# Altium PCB Test_Board_PCB.PcbDoc
Units mil, origin at the board's own origin, x right, y up, seen from the top; angles counter-clockwise.
Board outline 6000 x 4000 mil, 2 copper layers (Top Layer, Bottom Layer); 11 components, 20 nets, 45 pads, 0 vias.
Unrouted connection lines stored in the file: 12.
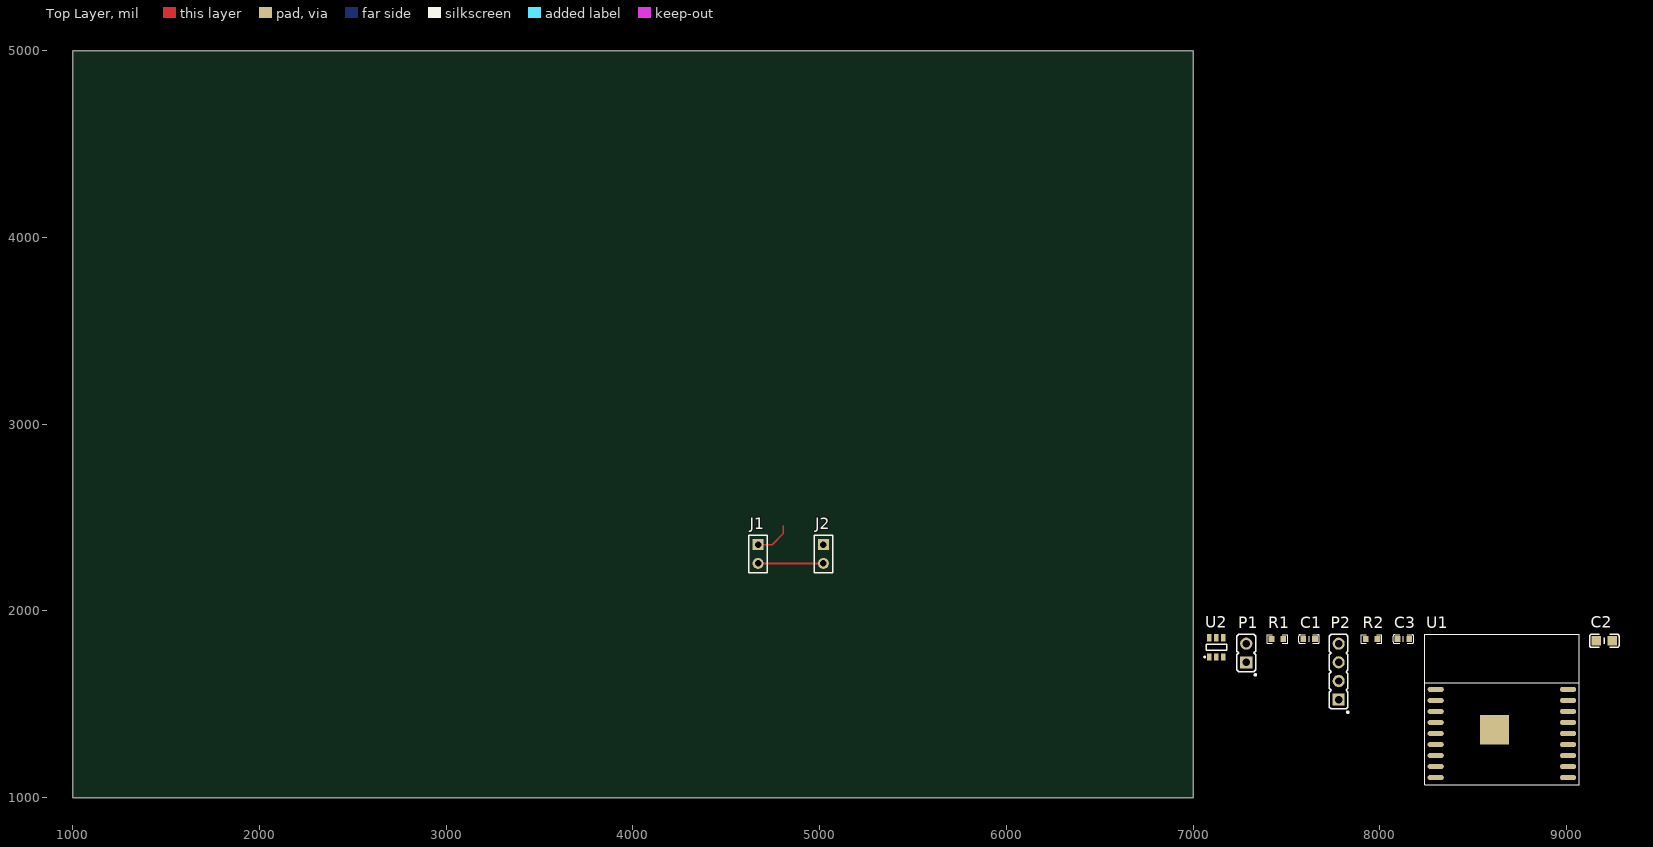
[diagram p0: Top Layer view]
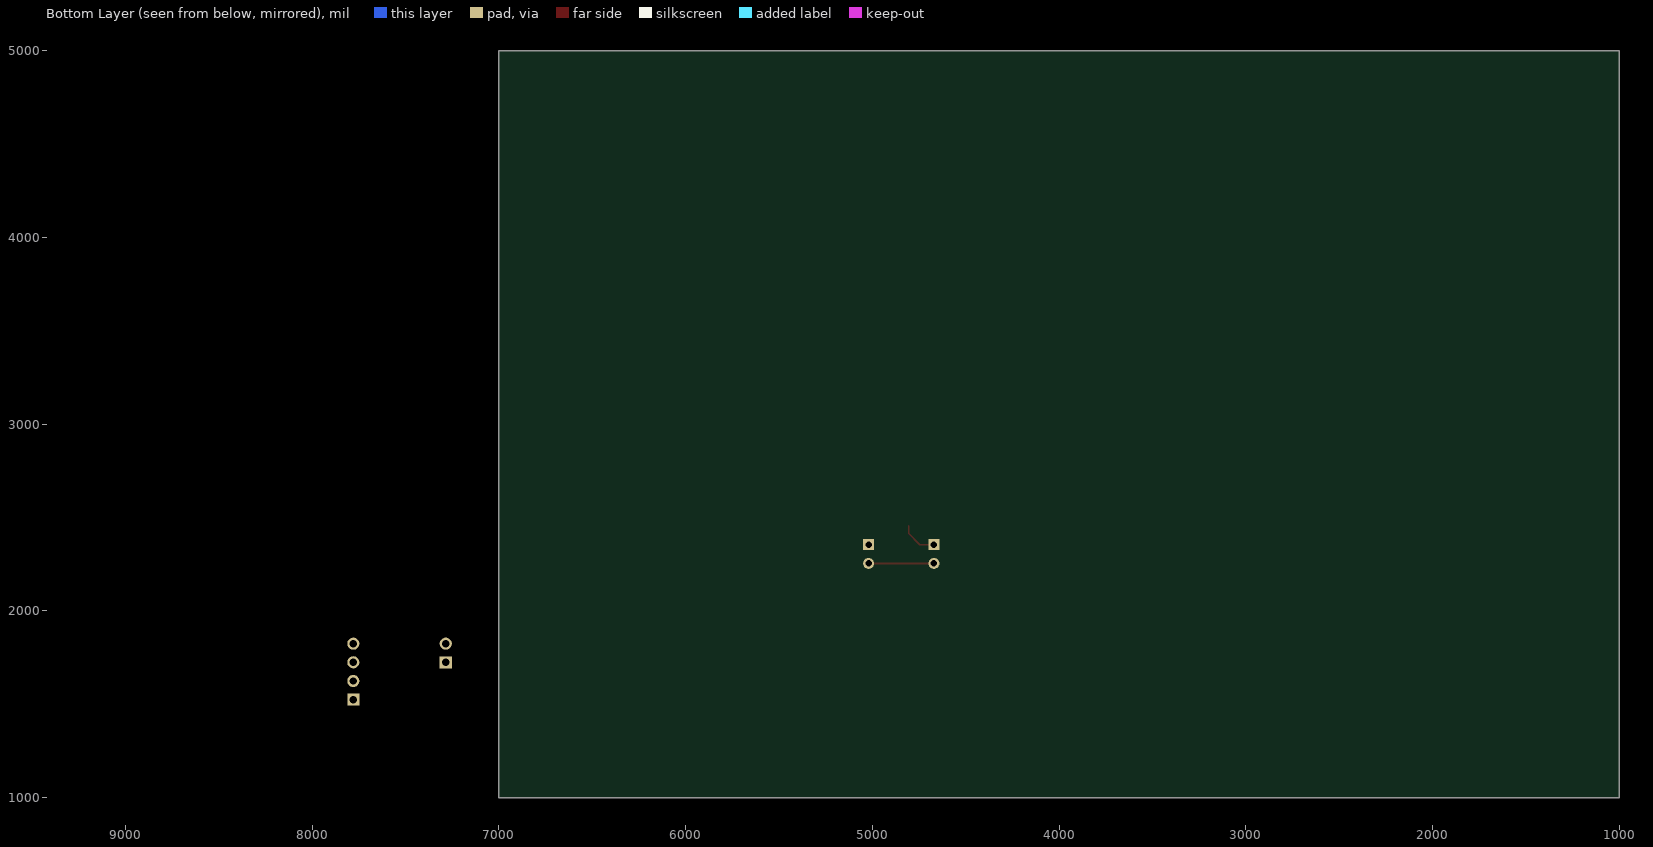
[diagram p1: Bottom Layer view, seen from below]

## Layer stack, top to bottom
Top Solder: solder mask 0.4, Solder Resist, Dk 3.5
Top Layer: signal copper 1.4
Dielectric 1: dielectric 12.6, FR-4, Dk 4.8
Bottom Layer: signal copper 1.4
Bottom Solder: solder mask 0.4, Solder Resist, Dk 3.5

## Board outline
1000,1000 7000,1000 7000,5000 1000,5000

## Design rules (kind name [scope] priority, off if disabled: settings)
Clearance [All] p1: gap=10 ignorepadtopadclearanceinfootprint=FALSE except(0: Arc-Hole Track-Hole SMDPad-Hole THPad-Hole Via-Hole Fill-Hole Poly-Hole Region-Hole Text-Hole)
PolygonConnect [All] p1: connectstyle=Relief reliefconductorwidth=10 reliefentries=4 polygonreliefangle="90 Angle" airgapwidth=10
RoutingVias [All] p1: holewidth=28 width=50 viastyle="Through Hole" minholewidth=28 minwidth=50 maxholewidth=28 maxwidth=50
SolderMaskExpansion [All] p1: expansion=4
Width [All] p1: maxlimit=10 minlimit=10 preferedwidth=10
Width 3V3 [InNetClass('All Nets')] p2: maxlimit=5 minlimit=5 preferedwidth=5
30 further rules are at their usual default settings.

## Classes and differential pairs
net class 5V: 5V GND
net class 3V3: 3V3 GND

## Components (designator, comment, footprint, x,y, rotation, side; value= is the part's Value field where it differs from the comment)
C1 "Cap" C-0603 7590,1850 r0 top value=0.1uF
C2 "Cap" C-0805 9160,1840 r0 top value=10uF
C3 "Cap" C-0603 8095,1850 r0 top value=0.1uF
J1 "Header 2" HDR1X2 4670,2355 r270 top
J2 "Header 2" HDR1X2 5020,2355 r270 top
P1 "Header 2" P1-2,header 7285,1725 r90 top
P2 "Header 4" P1-4,header 7780,1525 r90 top
R1 "Res2" R-0603 7420,1850 r0 top value=10K
R2 "Res2" R-0603 7925,1850 r0 top value=10K
U1 "ESP-WROOM-02" ESP-WROOM-02 8300,1580 r0 top
U2 "RH6016C" SOT-23-6 7125,1805 r0 top

## Footprints (in the part's own frame and the unit in brackets; to place one, negate y for a bottom-side part, rotate by r counter-clockwise, add the part's x,y. Pads: shape width x height; smd on the part's side, far side on the other; paste and mask are expansions set on the pad)
C-0603 [mm]
  rect 0.8x0.8 smd: 1(0,0) 2(1.6,0)
  silkscreen extent -0.6,-0.6 2.2,0.6, body extent 0,-0.4 1.6,0.4, height 0.8
C-0805 [mm]
  rect 1.3x1.3 smd: 1(0,0) 2(2.2,0)
  silkscreen extent -0.9,-0.9 3.1,0.9, body extent 0.1,-0.62 2.1,0.63, height 0.85
ESP-WROOM-02 [mm]
  oval 2.2x0.7 smd: 1(0,0) 2(0,-1.5) 3(0,-3) 4(0,-4.5) 5(0,-6) 6(0,-7.5) 7(0,-9) 8(0,-10.5) 9(0,-12) 10(18,-12) 11(18,-10.5) 12(18,-9) 13(18,-7.5) 14(18,-6) 15(18,-4.5) 16(18,-3) 17(18,-1.5) 18(18,0)
  rect 4x4 smd: 19(8,-5.5)
  silkscreen extent -1.5,-13 19.5,7.5, body extent -0.01,-12.9 17.99,7.1, height 3
HDR1X2 [mm] "Connector; Header; 2 Position"
  rect 1.5x1.5 hole 0.9: 1(0,0)
  round 1.5 hole 0.9: 2(2.54,0)
  silkscreen extent -1.27,-1.27 3.81,1.27
P1-2,header [mm]
  rect 1.65x1.65 hole 1.016: 1(0,0)
  round 1.65 hole 1.016: 2(2.54,0)
  silkscreen extent -1.83,-1.37 3.81,1.27, body extent -1.27,-1.27 3.81,1.27, height 8.54
P1-4,header [mm]
  rect 1.65x1.65 hole 1.016: 1(0,0)
  round 1.65 hole 1.016: 2(2.54,0) 3(5.083,0) 4(7.62,0)
  silkscreen extent -1.83,-1.37 8.89,1.27, body extent -1.27,-1.27 8.89,2.03, height 13
R-0603 [mm]
  rect 0.8x0.8 smd: 1(0,0) 2(1.6,0)
  silkscreen extent -0.6,-0.6 2.2,0.6, body extent 0,-0.4 1.6,0.4, height 0.45
SOT-23-6 [mm]
  rect 0.6x1 smd: 1(-0.95,-1.3) 2(0,-1.3) 3(0.95,-1.3) 4(0.95,1.3) 5(0,1.3) 6(-0.95,1.3)
  silkscreen extent -1.7,-1.4 1.4,0.4, body extent -1.45,-1.41 1.45,1.41, height 1.15

## Part data
C1 C2 C3: "Capacitor", LatestRevisionDate=17-Jul-2002, LatestRevisionNote="Re-released for DXP Platform.", PackageDescription="Radial Cap, Thru-Hole; 2 Leads; 0.3 in Pin Spacing", PackageReference=RAD-0.3, Published=8-Jun-2000, Publisher="Altium Limited"
J1 J2 P1: "Header, 2-Pin", LatestRevisionDate=17-Jul-2002, LatestRevisionNote="Re-released for DXP Platform.", Publisher="Altium Limited"
P2: "Header, 4-Pin", LatestRevisionDate=17-Jul-2002, LatestRevisionNote="Re-released for DXP Platform.", Publisher="Altium Limited"
R1 R2: "Resistor", LatestRevisionDate=17-Jul-2002, LatestRevisionNote="Re-released for DXP Platform.", PackageDescription="Axial Device, Thru-Hole; 2 Leads; 0.4 in Pin Spacing", PackageReference=AXIAL-0.4, Published=8-Jun-2000, Publisher="Altium Limited"

## Nets (pads, with @x,y where several pads share a name; then routed paths per layer and width w, separated by ;. In a path a pad name is that pad's centre, name@x,y a point inside that pad or via, vN(x,y) a via of type N, cw(c..) or ccw(c..) an arc to the next point about the centre after c; other vN are vias at no path point)
3V3: J1.1 | length 199.9
  Top Layer w10: J1.1 4745,2355 4805,2415 4805,2455
5V: J2.1
ADC: U1.16
EN: C1.2 R2.1 U1.2
GND: J1.2 J2.2 | length 350
  Top Layer w10: J1.2 J2.2
IO0: P1.1 U1.8
IO2: U1.7
IO4: U1.10
IO5: U1.14
IO12: U1.4
IO13: U1.5
IO14: U1.3
IO15: R1.1 U1.6
IO16: U1.17
NetC2_1: C2.1 C3.1 R2.2 U1.1
NetC2_2: C2.2 C3.2
NetU1_13: U1.13 U1.18 U1.19
RST: U1.15
RXD: P2.2 U1.11
TXD: P2.1 U1.12
pads on no net: C1.1 P1.2 P2.3 P2.4 R1.2 U1.9 U2.1 U2.2 U2.3 U2.4 U2.5 U2.6